# Altium PCB COF.PcbDoc (part 4 of 5)
Units mm, origin at the board's own origin, x right, y up, seen from the top; angles counter-clockwise.
Board outline 42.1 x 32.68 mm, 2 copper layers (TOP, BOTTOM), stack 0.321 mm thick; 42 components, 54 nets, 189 pads, 156 vias.
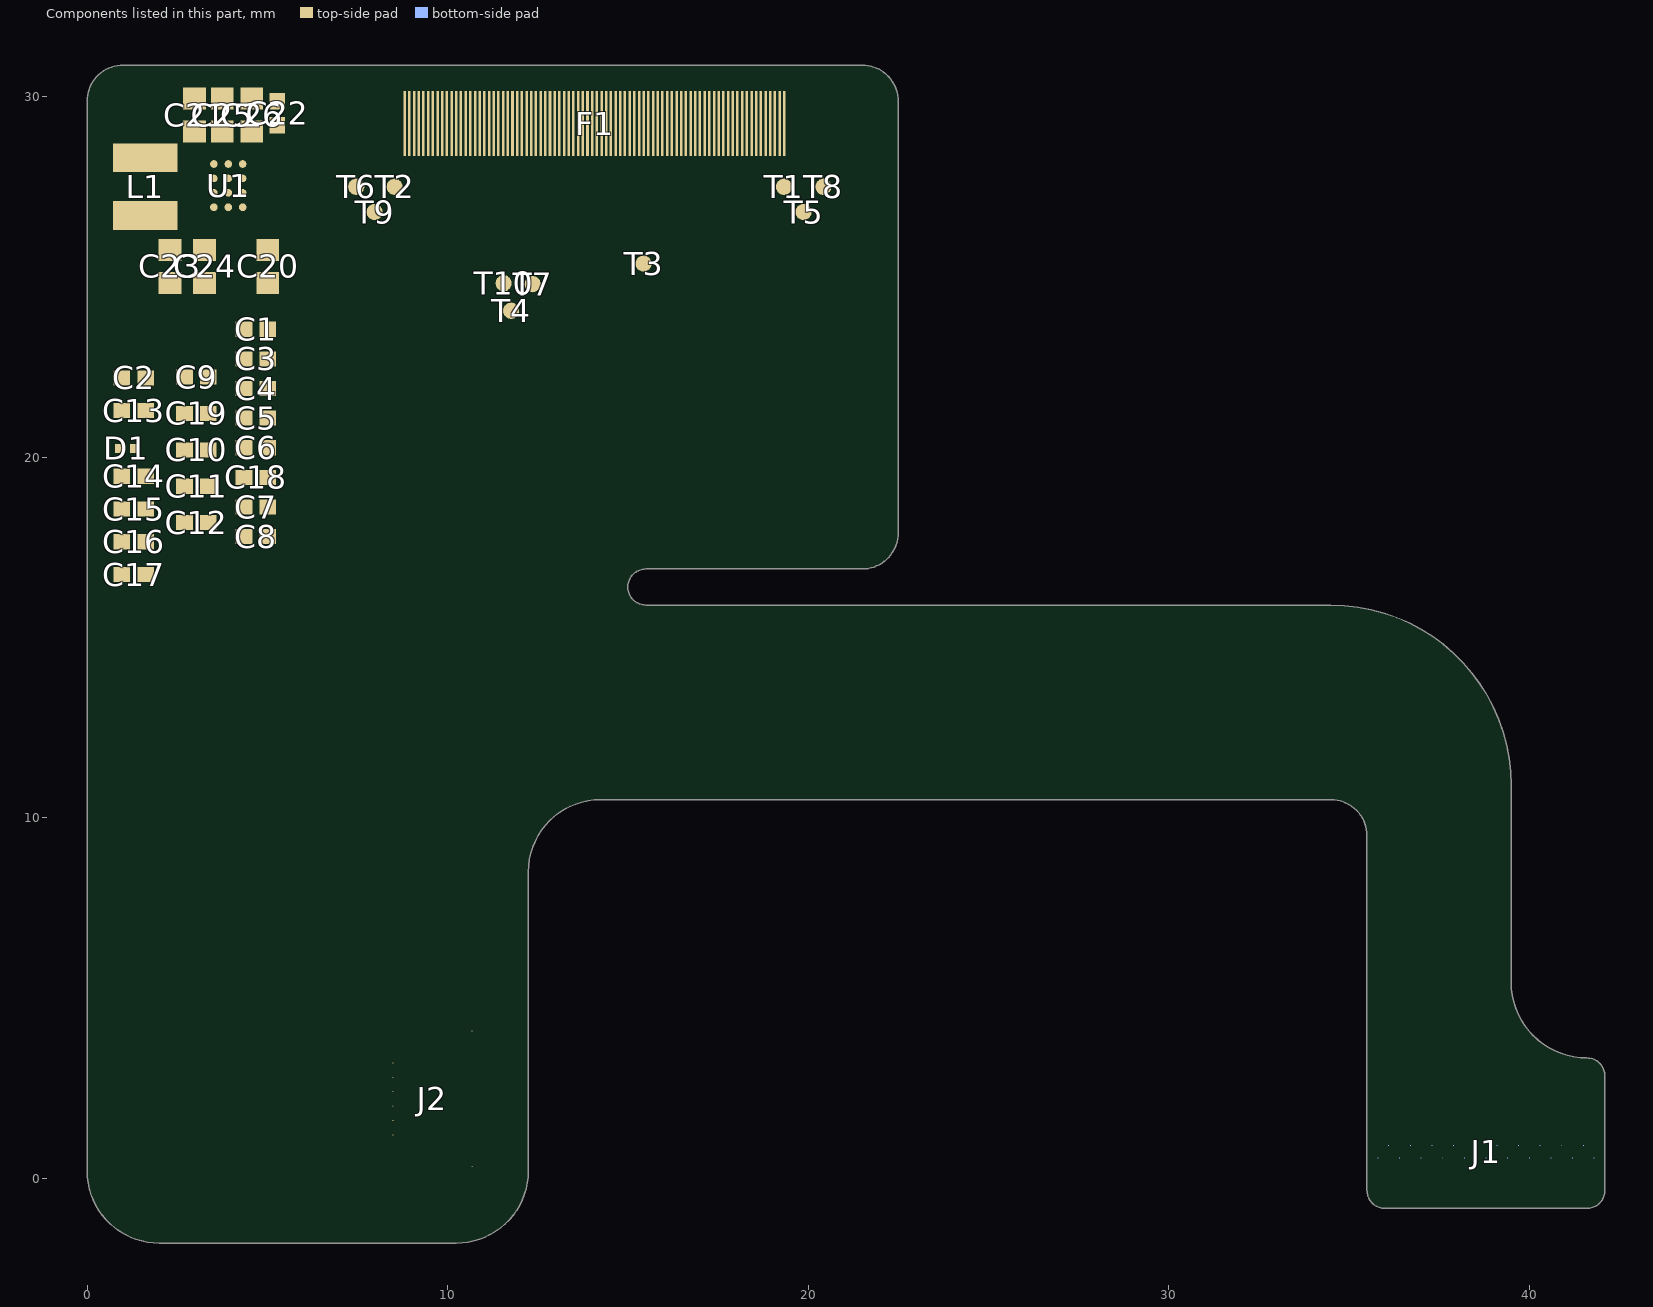
[diagram p3: the components of this part, seen from the top]

## Silkscreen, mask and mechanical layers (free items; w line width, h text height) (continued)
Fab Notes:
  drawing of 11907 lines, arcs and shapes, not listed
  text "GOAR<0102> EIN" at 13.683,38.228 h0.01 r270
  text "GOAR<0304> ECK1" at 13.773,38.235 h0.01 r270
  text "GOAR<0304> ECK1" at 13.803,38.235 h0.01 r270
  text "GOAR<0506> ECK2" at 13.863,38.235 h0.01 r270
  text "GOAR<0506> ECK2" at 13.893,38.235 h0.01 r270
  text "GOAR<09> DEMUX4" at 13.983,38.238 h0.01 r270
  text "GOAR<11> DEMUX5" at 14.013,38.238 h0.01 r270
  text "GOAR<13> DEMUX6" at 14.043,38.238 h0.01 r270
  text "GOAL<13> DEMUX3" at 14.073,38.237 h0.01 r270
  text "GOAL<11> DEMUX2" at 14.103,38.237 h0.01 r270
  text "GOAL<09> DEMUX1" at 14.133,38.237 h0.01 r270
  text "GOAL<0506> SCK2" at 14.223,38.234 h0.01 r270
  text "GOAL<0506> SCK2" at 14.253,38.234 h0.01 r270
  text "GOAL<0304> SCK1" at 14.313,38.234 h0.01 r270
  text "GOAL<0304> SCK1" at 14.343,38.234 h0.01 r270
  text "GOAL<0102> SIN" at 14.433,38.227 h0.01 r270
  text "DUMMY" at 9.245,38.197 h0.01 r270
  text "DUMMY" at 9.275,38.197 h0.01 r270
  text "DUMMY" at 9.305,38.197 h0.01 r270
  text "DUMMY" at 9.335,38.197 h0.01 r270
  text "DUMMY" at 9.365,38.197 h0.01 r270
  text "DUMMY" at 9.395,38.197 h0.01 r270
  text "FOG1_R" at 9.425,38.198 h0.01 r270
  text "FOG2_R" at 9.455,38.198 h0.01 r270
  text "DUMMY" at 9.485,38.197 h0.01 r270
  text "DUMMY" at 9.755,38.197 h0.01 r270
  text "DUMMY" at 9.785,38.197 h0.01 r270
  text "DUMMY" at 9.815,38.197 h0.01 r270
  text "DUMMY" at 10.085,38.197 h0.01 r270
  text "DUMMY" at 10.115,38.197 h0.01 r270
  text "DUMMY" at 13.203,38.197 h0.01 r270
  text "DUMMY" at 13.233,38.197 h0.01 r270
  text "DUMMY" at 13.323,38.197 h0.01 r270
  text "DUMMY" at 13.353,38.197 h0.01 r270
  text "DUMMY" at 13.383,38.197 h0.01 r270
  text "DUMMY" at 13.413,38.197 h0.01 r270
  text "DUMMY" at 13.443,38.197 h0.01 r270
  text "DUMMY" at 13.473,38.197 h0.01 r270
  text "DUMMY" at 13.563,38.197 h0.01 r270
  text "DUMMY" at 13.593,38.197 h0.01 r270
  text "EM_OUT" at 13.623,38.199 h0.01 r270
  text "DUMMY" at 13.653,38.197 h0.01 r270
  text "DUMMY" at 13.713,38.197 h0.01 r270
  text "DUMMY" at 13.743,38.197 h0.01 r270
  text "DUMMY" at 13.833,38.197 h0.01 r270
  text "DUMMY" at 13.923,38.197 h0.01 r270
  text "DUMMY" at 13.953,38.197 h0.01 r270
  text "DUMMY" at 14.163,38.197 h0.01 r270
  text "DUMMY" at 14.193,38.197 h0.01 r270
  text "DUMMY" at 14.283,38.197 h0.01 r270
  text "DUMMY" at 14.373,38.197 h0.01 r270
  text "DUMMY" at 14.403,38.197 h0.01 r270
  text "DUMMY" at 14.463,38.197 h0.01 r270
  text "SCAN_OUT" at 14.493,38.208 h0.01 r270
  text "DUMMY" at 14.523,38.197 h0.01 r270
  text "DUMMY" at 14.553,38.197 h0.01 r270
  text "DUMMY" at 14.643,38.197 h0.01 r270
  text "DUMMY" at 14.673,38.197 h0.01 r270
  text "DUMMY" at 14.763,38.197 h0.01 r270
  text "DUMMY" at 14.793,38.197 h0.01 r270
  text "DUMMY" at 14.883,38.197 h0.01 r270
  text "DUMMY" at 14.913,38.197 h0.01 r270
  text "DUMMY" at 18.031,38.197 h0.01 r270
  text "DUMMY" at 18.061,38.197 h0.01 r270
  text "DUMMY" at 18.331,38.197 h0.01 r270
  text "DUMMY" at 18.361,38.197 h0.01 r270
  text "DUMMY" at 18.391,38.197 h0.01 r270
  text "DUMMY" at 18.661,38.197 h0.01 r270
  text "FOG2_L" at 18.691,38.197 h0.01 r270
  text "FOG1_L" at 18.721,38.197 h0.01 r270
  text "DUMMY" at 18.751,38.197 h0.01 r270
  text "DUMMY" at 18.781,38.197 h0.01 r270
  text "DUMMY" at 18.811,38.197 h0.01 r270
  text "DUMMY" at 18.841,38.197 h0.01 r270
  text "DUMMY" at 18.871,38.197 h0.01 r270
  text "DUMMY" at 18.901,38.197 h0.01 r270
  text "ELVSS" at 9.515,38.193 h0.01 r270
  text "ELVSS" at 9.545,38.193 h0.01 r270
  text "ELVSS" at 9.575,38.193 h0.01 r270
  text "ELVSS" at 9.605,38.193 h0.01 r270
  text "ELVSS" at 9.635,38.193 h0.01 r270
  text "ELVSS" at 9.665,38.193 h0.01 r270
  text "ELVSS" at 9.695,38.193 h0.01 r270
  text "ELVSS" at 9.725,38.193 h0.01 r270
  text "ELVDD" at 9.845,38.194 h0.01 r270
  text "ELVDD" at 9.875,38.194 h0.01 r270
  text "ELVDD" at 9.905,38.194 h0.01 r270
  text "ELVDD" at 9.935,38.194 h0.01 r270
  text "ELVDD" at 9.965,38.194 h0.01 r270
  text "ELVDD" at 9.995,38.194 h0.01 r270
  text "ELVDD" at 10.025,38.194 h0.01 r270
  text "ELVDD" at 10.055,38.194 h0.01 r270
  text "S1" at 10.145,38.179 h0.01 r270
  text "S2" at 10.175,38.179 h0.01 r270
  text "S3" at 10.205,38.179 h0.01 r270
  text "S4" at 10.235,38.179 h0.01 r270
  text "S5" at 10.265,38.179 h0.01 r270
  text "S6" at 10.295,38.179 h0.01 r270
  text "S7" at 10.324,38.179 h0.01 r270
  text "S8" at 10.354,38.179 h0.01 r270
  text "S9" at 10.384,38.179 h0.01 r270
  text "S10" at 10.414,38.183 h0.01 r270
  text "S11" at 10.444,38.183 h0.01 r270
  text "S12" at 10.474,38.183 h0.01 r270
  text "S13" at 10.504,38.183 h0.01 r270
  text "S14" at 10.534,38.183 h0.01 r270
  text "S15" at 10.564,38.183 h0.01 r270
  text "S16" at 10.594,38.183 h0.01 r270
  text "S17" at 10.624,38.183 h0.01 r270
  text "S18" at 10.654,38.183 h0.01 r270
  text "S19" at 10.684,38.183 h0.01 r270
  text "S20" at 10.714,38.183 h0.01 r270
  text "S21" at 10.744,38.183 h0.01 r270
  text "S22" at 10.774,38.183 h0.01 r270
  text "S23" at 10.804,38.183 h0.01 r270
  text "S24" at 10.834,38.183 h0.01 r270
  text "S25" at 10.864,38.183 h0.01 r270
  text "S26" at 10.894,38.183 h0.01 r270
  text "S27" at 10.924,38.183 h0.01 r270
  text "S28" at 10.954,38.183 h0.01 r270
  text "S29" at 10.984,38.183 h0.01 r270
  text "S30" at 11.014,38.183 h0.01 r270
  text "S31" at 11.044,38.183 h0.01 r270
  text "S32" at 11.074,38.183 h0.01 r270
  text "S33" at 11.104,38.183 h0.01 r270
  text "S34" at 11.134,38.183 h0.01 r270
  text "S35" at 11.164,38.183 h0.01 r270
  text "S36" at 11.194,38.183 h0.01 r270
  text "S37" at 11.224,38.183 h0.01 r270
  text "S38" at 11.254,38.183 h0.01 r270
  text "S39" at 11.284,38.183 h0.01 r270
  text "S40" at 11.314,38.183 h0.01 r270
  text "S41" at 11.344,38.183 h0.01 r270
  text "S42" at 11.374,38.183 h0.01 r270
  text "S43" at 11.404,38.183 h0.01 r270
  text "S44" at 11.434,38.183 h0.01 r270
  text "S45" at 11.464,38.183 h0.01 r270
  text "S46" at 11.494,38.183 h0.01 r270
  text "S47" at 11.524,38.183 h0.01 r270
  text "S48" at 11.554,38.183 h0.01 r270
  text "S49" at 11.584,38.183 h0.01 r270
  text "S50" at 11.614,38.183 h0.01 r270
  text "S51" at 11.644,38.183 h0.01 r270
  text "S52" at 11.674,38.183 h0.01 r270
  text "S53" at 11.704,38.183 h0.01 r270
  text "S54" at 11.734,38.183 h0.01 r270
  text "S55" at 11.764,38.183 h0.01 r270
  text "S56" at 11.794,38.183 h0.01 r270
  text "S57" at 11.824,38.183 h0.01 r270
  text "S58" at 11.854,38.183 h0.01 r270
  text "S59" at 11.884,38.183 h0.01 r270
  text "S60" at 11.914,38.183 h0.01 r270
  text "S61" at 11.944,38.183 h0.01 r270
  text "S62" at 11.974,38.183 h0.01 r270
  text "S63" at 12.004,38.183 h0.01 r270
  text "S64" at 12.034,38.183 h0.01 r270
  text "S65" at 12.064,38.183 h0.01 r270
  text "S66" at 12.094,38.183 h0.01 r270
  text "S67" at 12.124,38.183 h0.01 r270
  text "S68" at 12.154,38.183 h0.01 r270
  text "S69" at 12.184,38.183 h0.01 r270
  text "S70" at 12.214,38.183 h0.01 r270
  text "S71" at 12.244,38.183 h0.01 r270
  text "S72" at 12.274,38.183 h0.01 r270
  text "S73" at 12.304,38.183 h0.01 r270
  text "S74" at 12.334,38.183 h0.01 r270
  text "S75" at 12.364,38.183 h0.01 r270
  text "S76" at 12.394,38.183 h0.01 r270
  text "S77" at 12.424,38.183 h0.01 r270
  text "S78" at 12.454,38.183 h0.01 r270
  text "S79" at 12.484,38.183 h0.01 r270
  text "S80" at 12.514,38.183 h0.01 r270
  text "S81" at 12.544,38.183 h0.01 r270
  text "S82" at 12.574,38.183 h0.01 r270
  text "S83" at 12.604,38.183 h0.01 r270
  text "S84" at 12.634,38.183 h0.01 r270
  text "S85" at 12.664,38.183 h0.01 r270
  text "S86" at 12.694,38.183 h0.01 r270
  text "S87" at 12.724,38.183 h0.01 r270
  text "S88" at 12.754,38.183 h0.01 r270
  text "S89" at 12.784,38.183 h0.01 r270
  text "S90" at 12.814,38.183 h0.01 r270
  text "S91" at 12.843,38.183 h0.01 r270
  text "S92" at 12.873,38.183 h0.01 r270
  text "S93" at 12.903,38.183 h0.01 r270
  text "S94" at 12.933,38.183 h0.01 r270
  text "S95" at 12.963,38.183 h0.01 r270
  text "S96" at 12.993,38.183 h0.01 r270
  text "S97" at 13.023,38.183 h0.01 r270
  text "S98" at 13.053,38.183 h0.01 r270
  text "S99" at 13.083,38.183 h0.01 r270
  text "S100" at 13.113,38.187 h0.01 r270
  text "S101" at 13.143,38.187 h0.01 r270
  text "S102" at 13.173,38.187 h0.01 r270
  text "VGL" at 13.263,38.184 h0.01 r270
  text "VGL" at 13.293,38.184 h0.01 r270
  text "VGH" at 13.503,38.185 h0.01 r270
  text "VGH" at 13.533,38.185 h0.01 r270
  text "VGH" at 14.583,38.185 h0.01 r270
  text "VGH" at 14.613,38.185 h0.01 r270
  text "VINT" at 14.703,38.186 h0.01 r270
  text "VINT" at 14.733,38.186 h0.01 r270
  text "VGL" at 14.823,38.184 h0.01 r270
  text "VGL" at 14.853,38.184 h0.01 r270
  text "S132" at 14.943,38.187 h0.01 r270
  text "S133" at 14.973,38.187 h0.01 r270
  text "S134" at 15.003,38.187 h0.01 r270
  text "S135" at 15.033,38.187 h0.01 r270
  text "S136" at 15.063,38.187 h0.01 r270
  text "S137" at 15.093,38.187 h0.01 r270
  text "S138" at 15.123,38.187 h0.01 r270
  text "S139" at 15.153,38.187 h0.01 r270
  text "S140" at 15.183,38.187 h0.01 r270
  text "S141" at 15.213,38.187 h0.01 r270
  text "S142" at 15.243,38.187 h0.01 r270
  text "S143" at 15.273,38.187 h0.01 r270
  text "S144" at 15.303,38.187 h0.01 r270
  text "S145" at 15.332,38.187 h0.01 r270
  text "S146" at 15.362,38.187 h0.01 r270
  text "S147" at 15.392,38.187 h0.01 r270
  text "S148" at 15.422,38.187 h0.01 r270
  text "S149" at 15.452,38.187 h0.01 r270
  text "S150" at 15.482,38.187 h0.01 r270
  text "S151" at 15.512,38.187 h0.01 r270
  text "S152" at 15.542,38.187 h0.01 r270
  text "S153" at 15.572,38.187 h0.01 r270
  text "S154" at 15.602,38.187 h0.01 r270
  text "S155" at 15.632,38.187 h0.01 r270
  text "S156" at 15.662,38.187 h0.01 r270
  text "S157" at 15.692,38.187 h0.01 r270
  text "S158" at 15.722,38.187 h0.01 r270
  text "S159" at 15.752,38.187 h0.01 r270
  text "S160" at 15.782,38.187 h0.01 r270
  text "S161" at 15.812,38.187 h0.01 r270
  text "S162" at 15.842,38.187 h0.01 r270
  text "S163" at 15.872,38.187 h0.01 r270
  text "S164" at 15.902,38.187 h0.01 r270
  text "S165" at 15.932,38.187 h0.01 r270
  text "S166" at 15.962,38.187 h0.01 r270
  text "S167" at 15.992,38.187 h0.01 r270
  text "S168" at 16.022,38.187 h0.01 r270
  text "S169" at 16.052,38.187 h0.01 r270
  text "S170" at 16.082,38.187 h0.01 r270
  text "S171" at 16.112,38.187 h0.01 r270
  text "S172" at 16.142,38.187 h0.01 r270
  text "S173" at 16.172,38.187 h0.01 r270
  text "S174" at 16.202,38.187 h0.01 r270
  text "S175" at 16.232,38.187 h0.01 r270
  text "S176" at 16.262,38.187 h0.01 r270
  text "S177" at 16.292,38.187 h0.01 r270
  text "S178" at 16.322,38.187 h0.01 r270
  text "S179" at 16.352,38.187 h0.01 r270
  text "S180" at 16.382,38.187 h0.01 r270
  text "S181" at 16.412,38.187 h0.01 r270
  text "S182" at 16.442,38.187 h0.01 r270
  text "S183" at 16.472,38.187 h0.01 r270
  text "S184" at 16.502,38.187 h0.01 r270
  text "S185" at 16.532,38.187 h0.01 r270
  text "S186" at 16.562,38.187 h0.01 r270
  text "S187" at 16.592,38.187 h0.01 r270
  text "S188" at 16.622,38.187 h0.01 r270
  text "S189" at 16.652,38.187 h0.01 r270
  text "S190" at 16.682,38.187 h0.01 r270
  text "S191" at 16.712,38.187 h0.01 r270
  text "S192" at 16.742,38.187 h0.01 r270
  text "S193" at 16.772,38.187 h0.01 r270
  text "S194" at 16.802,38.187 h0.01 r270
  text "S195" at 16.832,38.187 h0.01 r270
  text "S196" at 16.862,38.187 h0.01 r270
  text "S197" at 16.892,38.187 h0.01 r270
  text "S198" at 16.922,38.187 h0.01 r270
  text "S199" at 16.952,38.187 h0.01 r270
  text "S200" at 16.982,38.187 h0.01 r270
  text "S201" at 17.012,38.187 h0.01 r270
  text "S202" at 17.042,38.187 h0.01 r270
  text "S203" at 17.072,38.187 h0.01 r270
  text "S204" at 17.102,38.187 h0.01 r270
  text "S205" at 17.132,38.187 h0.01 r270
  text "S206" at 17.162,38.187 h0.01 r270
  text "S207" at 17.192,38.187 h0.01 r270
  text "S208" at 17.222,38.187 h0.01 r270
  text "S209" at 17.252,38.187 h0.01 r270
  text "S210" at 17.282,38.187 h0.01 r270
  text "S211" at 17.312,38.187 h0.01 r270
  text "S212" at 17.342,38.187 h0.01 r270
  text "S213" at 17.372,38.187 h0.01 r270
  text "S214" at 17.402,38.187 h0.01 r270
  text "S215" at 17.432,38.187 h0.01 r270
  text "S216" at 17.462,38.187 h0.01 r270
  text "S217" at 17.492,38.187 h0.01 r270
  text "S218" at 17.522,38.187 h0.01 r270
  text "S219" at 17.552,38.187 h0.01 r270
  text "S220" at 17.582,38.187 h0.01 r270
  text "S221" at 17.612,38.187 h0.01 r270
  text "S222" at 17.642,38.187 h0.01 r270
  text "S223" at 17.672,38.187 h0.01 r270
  text "S224" at 17.702,38.187 h0.01 r270
  text "S225" at 17.732,38.187 h0.01 r270
  text "S226" at 17.762,38.187 h0.01 r270
  text "S227" at 17.792,38.187 h0.01 r270
  text "S228" at 17.821,38.187 h0.01 r270
  text "S229" at 17.851,38.187 h0.01 r270
  text "S230" at 17.881,38.187 h0.01 r270
  text "S231" at 17.911,38.187 h0.01 r270
  text "S232" at 17.941,38.187 h0.01 r270
  text "S233" at 17.971,38.187 h0.01 r270
  text "S234" at 18.001,38.187 h0.01 r270
  text "ELVDD" at 18.091,38.194 h0.01 r270
  text "ELVDD" at 18.121,38.194 h0.01 r270
  text "ELVDD" at 18.151,38.194 h0.01 r270
  text "ELVDD" at 18.181,38.194 h0.01 r270
  text "ELVDD" at 18.211,38.194 h0.01 r270
  text "ELVDD" at 18.241,38.194 h0.01 r270
  text "ELVDD" at 18.271,38.194 h0.01 r270
  text "ELVDD" at 18.301,38.194 h0.01 r270
  text "ELVSS" at 18.421,38.193 h0.01 r270
  text "ELVSS" at 18.451,38.193 h0.01 r270
  text "ELVSS" at 18.481,38.193 h0.01 r270
  text "ELVSS" at 18.511,38.193 h0.01 r270
  text "ELVSS" at 18.541,38.193 h0.01 r270
  text "ELVSS" at 18.571,38.193 h0.01 r270
  text "ELVSS" at 18.601,38.193 h0.01 r270
  text "ELVSS" at 18.631,38.193 h0.01 r270
  text "323" at 9.255,38.119 h0.01 r90
  text "322" at 9.285,38.119 h0.01 r90
  text "321" at 9.315,38.119 h0.01 r90
  text "320" at 9.345,38.119 h0.01 r90
  text "319" at 9.375,38.119 h0.01 r90
  text "318" at 9.405,38.119 h0.01 r90
  text "317" at 9.435,38.119 h0.01 r90
  text "316" at 9.465,38.119 h0.01 r90
  text "315" at 9.495,38.119 h0.01 r90
  text "314" at 9.525,38.119 h0.01 r90
  text "313" at 9.555,38.119 h0.01 r90
  text "312" at 9.585,38.119 h0.01 r90
  text "311" at 9.615,38.119 h0.01 r90
  text "310" at 9.645,38.119 h0.01 r90
  text "309" at 9.675,38.119 h0.01 r90
  text "308" at 9.705,38.119 h0.01 r90
  text "307" at 9.735,38.119 h0.01 r90
  text "306" at 9.765,38.119 h0.01 r90
  text "305" at 9.795,38.119 h0.01 r90
  text "304" at 9.825,38.119 h0.01 r90
  text "303" at 9.855,38.119 h0.01 r90
  text "302" at 9.885,38.119 h0.01 r90
  text "301" at 9.915,38.119 h0.01 r90
  text "300" at 9.945,38.119 h0.01 r90
  text "299" at 9.975,38.119 h0.01 r90
  text "298" at 10.005,38.119 h0.01 r90
  text "297" at 10.035,38.119 h0.01 r90
  text "296" at 10.065,38.119 h0.01 r90
  text "295" at 10.095,38.119 h0.01 r90
  text "294" at 10.125,38.119 h0.01 r90
  text "293" at 10.155,38.119 h0.01 r90
  text "292" at 10.185,38.119 h0.01 r90
  text "291" at 10.215,38.119 h0.01 r90
  text "290" at 10.245,38.119 h0.01 r90
  text "289" at 10.275,38.119 h0.01 r90
  text "288" at 10.305,38.119 h0.01 r90
  text "287" at 10.334,38.119 h0.01 r90
  text "286" at 10.364,38.119 h0.01 r90
  text "285" at 10.394,38.119 h0.01 r90
  text "284" at 10.424,38.119 h0.01 r90
  text "283" at 10.454,38.119 h0.01 r90
  text "282" at 10.484,38.119 h0.01 r90
  text "281" at 10.514,38.119 h0.01 r90
  text "280" at 10.544,38.119 h0.01 r90
  text "279" at 10.574,38.119 h0.01 r90
  text "278" at 10.604,38.119 h0.01 r90
  text "277" at 10.634,38.119 h0.01 r90
  text "276" at 10.664,38.119 h0.01 r90
  text "275" at 10.694,38.119 h0.01 r90
  text "274" at 10.724,38.119 h0.01 r90
  text "273" at 10.754,38.119 h0.01 r90
  text "272" at 10.784,38.119 h0.01 r90
  text "271" at 10.814,38.119 h0.01 r90
  text "270" at 10.844,38.119 h0.01 r90
  text "269" at 10.874,38.119 h0.01 r90
  text "268" at 10.904,38.119 h0.01 r90
  text "267" at 10.934,38.119 h0.01 r90
  text "266" at 10.964,38.119 h0.01 r90
  text "265" at 10.994,38.119 h0.01 r90
  text "264" at 11.024,38.119 h0.01 r90
  text "263" at 11.054,38.119 h0.01 r90
  text "262" at 11.084,38.119 h0.01 r90
  text "261" at 11.114,38.119 h0.01 r90
  text "260" at 11.144,38.119 h0.01 r90
  text "259" at 11.174,38.119 h0.01 r90
  text "258" at 11.204,38.119 h0.01 r90
  text "257" at 11.234,38.119 h0.01 r90
  text "256" at 11.264,38.119 h0.01 r90
  text "255" at 11.294,38.119 h0.01 r90
  text "254" at 11.324,38.119 h0.01 r90
  text "253" at 11.354,38.119 h0.01 r90
  text "252" at 11.384,38.119 h0.01 r90
  text "251" at 11.414,38.119 h0.01 r90
  text "250" at 11.444,38.119 h0.01 r90
  text "249" at 11.474,38.119 h0.01 r90
  text "248" at 11.504,38.119 h0.01 r90
  text "247" at 11.534,38.119 h0.01 r90
  text "246" at 11.564,38.119 h0.01 r90
  text "245" at 11.594,38.119 h0.01 r90
  text "244" at 11.624,38.119 h0.01 r90
  text "243" at 11.654,38.119 h0.01 r90
  text "242" at 11.684,38.119 h0.01 r90
  text "241" at 11.714,38.119 h0.01 r90
  text "240" at 11.744,38.119 h0.01 r90
  text "239" at 11.774,38.119 h0.01 r90
  text "238" at 11.804,38.119 h0.01 r90
  text "237" at 11.834,38.119 h0.01 r90
  text "236" at 11.864,38.119 h0.01 r90
  text "235" at 11.894,38.119 h0.01 r90
  text "234" at 11.924,38.119 h0.01 r90
  text "233" at 11.954,38.119 h0.01 r90
  text "232" at 11.984,38.119 h0.01 r90
  text "231" at 12.014,38.119 h0.01 r90
  text "230" at 12.044,38.119 h0.01 r90
  text "229" at 12.074,38.119 h0.01 r90
  text "228" at 12.104,38.119 h0.01 r90
  text "227" at 12.134,38.119 h0.01 r90
  text "226" at 12.164,38.119 h0.01 r90
  text "225" at 12.194,38.119 h0.01 r90
  text "224" at 12.224,38.119 h0.01 r90
  text "223" at 12.254,38.119 h0.01 r90
  text "222" at 12.284,38.119 h0.01 r90
  text "221" at 12.314,38.119 h0.01 r90
  text "220" at 12.344,38.119 h0.01 r90
  text "219" at 12.374,38.119 h0.01 r90
  text "218" at 12.404,38.119 h0.01 r90
  text "217" at 12.434,38.119 h0.01 r90
  text "216" at 12.464,38.119 h0.01 r90
  text "215" at 12.494,38.119 h0.01 r90
  text "214" at 12.524,38.119 h0.01 r90
  text "213" at 12.554,38.119 h0.01 r90
  text "212" at 12.584,38.119 h0.01 r90
  text "211" at 12.614,38.119 h0.01 r90
  text "210" at 12.644,38.119 h0.01 r90
  text "209" at 12.674,38.119 h0.01 r90
  text "208" at 12.704,38.119 h0.01 r90
  text "207" at 12.734,38.119 h0.01 r90
  text "206" at 12.764,38.119 h0.01 r90
  text "205" at 12.794,38.119 h0.01 r90
  text "204" at 12.823,38.119 h0.01 r90
  text "203" at 12.853,38.119 h0.01 r90
  text "202" at 12.883,38.119 h0.01 r90
  text "201" at 12.913,38.119 h0.01 r90
  text "200" at 12.943,38.119 h0.01 r90
  text "199" at 12.973,38.119 h0.01 r90
  text "198" at 13.003,38.119 h0.01 r90
  text "197" at 13.033,38.119 h0.01 r90
  text "196" at 13.063,38.119 h0.01 r90
  text "195" at 13.093,38.119 h0.01 r90
  text "194" at 13.123,38.119 h0.01 r90
  text "193" at 13.153,38.119 h0.01 r90
  text "192" at 13.183,38.119 h0.01 r90
  text "191" at 13.213,38.119 h0.01 r90
  text "190" at 13.243,38.119 h0.01 r90
  text "189" at 13.273,38.119 h0.01 r90
  text "188" at 13.303,38.119 h0.01 r90
  text "187" at 13.333,38.119 h0.01 r90
  text "186" at 13.363,38.119 h0.01 r90
  text "185" at 13.393,38.119 h0.01 r90
  text "184" at 13.423,38.119 h0.01 r90
  text "183" at 13.453,38.119 h0.01 r90
  text "182" at 13.483,38.119 h0.01 r90
  text "181" at 13.513,38.119 h0.01 r90
  text "180" at 13.543,38.119 h0.01 r90
  text "179" at 13.573,38.119 h0.01 r90
  text "178" at 13.603,38.119 h0.01 r90
  text "177" at 13.633,38.119 h0.01 r90
  text "176" at 13.663,38.119 h0.01 r90
  text "175" at 13.693,38.119 h0.01 r90
  text "174" at 13.723,38.119 h0.01 r90
  text "173" at 13.753,38.119 h0.01 r90
  text "172" at 13.783,38.119 h0.01 r90
  text "171" at 13.813,38.119 h0.01 r90
  text "170" at 13.843,38.119 h0.01 r90
  text "169" at 13.873,38.119 h0.01 r90
  text "168" at 13.903,38.119 h0.01 r90
  text "167" at 13.933,38.119 h0.01 r90
  text "166" at 13.963,38.119 h0.01 r90
  text "165" at 13.993,38.119 h0.01 r90
  text "164" at 14.023,38.119 h0.01 r90
  text "163" at 14.053,38.119 h0.01 r90
  text "162" at 14.083,38.119 h0.01 r90
  text "161" at 14.113,38.119 h0.01 r90
  text "160" at 14.143,38.119 h0.01 r90
  text "159" at 14.173,38.119 h0.01 r90
  text "158" at 14.203,38.119 h0.01 r90
  text "157" at 14.233,38.119 h0.01 r90
  text "156" at 14.263,38.119 h0.01 r90
  text "155" at 14.293,38.119 h0.01 r90
  text "154" at 14.323,38.119 h0.01 r90
  text "153" at 14.353,38.119 h0.01 r90
  text "152" at 14.383,38.119 h0.01 r90
  text "151" at 14.413,38.119 h0.01 r90
  text "150" at 14.443,38.119 h0.01 r90
  text "149" at 14.473,38.119 h0.01 r90
  text "148" at 14.503,38.119 h0.01 r90
  text "147" at 14.533,38.119 h0.01 r90
  text "146" at 14.563,38.119 h0.01 r90
  text "145" at 14.593,38.119 h0.01 r90
  text "144" at 14.623,38.119 h0.01 r90
  text "143" at 14.653,38.119 h0.01 r90
  text "142" at 14.683,38.119 h0.01 r90
  text "141" at 14.713,38.119 h0.01 r90
  text "140" at 14.743,38.119 h0.01 r90
  text "139" at 14.773,38.119 h0.01 r90
  text "138" at 14.803,38.119 h0.01 r90
  text "137" at 14.833,38.119 h0.01 r90
  text "136" at 14.863,38.119 h0.01 r90
  text "135" at 14.893,38.119 h0.01 r90
  text "134" at 14.923,38.119 h0.01 r90
  text "133" at 14.953,38.119 h0.01 r90
  text "132" at 14.983,38.119 h0.01 r90
  text "131" at 15.013,38.119 h0.01 r90
  text "130" at 15.043,38.119 h0.01 r90
  text "129" at 15.073,38.119 h0.01 r90
  text "128" at 15.103,38.119 h0.01 r90
  text "127" at 15.133,38.119 h0.01 r90
  text "126" at 15.163,38.119 h0.01 r90
  text "125" at 15.193,38.119 h0.01 r90
  text "124" at 15.223,38.119 h0.01 r90
  text "123" at 15.253,38.119 h0.01 r90
  text "122" at 15.283,38.119 h0.01 r90
  text "121" at 15.313,38.119 h0.01 r90
  text "120" at 15.342,38.119 h0.01 r90
  text "119" at 15.372,38.119 h0.01 r90
  text "118" at 15.402,38.119 h0.01 r90
  text "117" at 15.432,38.119 h0.01 r90
  text "116" at 15.462,38.119 h0.01 r90
  text "115" at 15.492,38.119 h0.01 r90
  text "114" at 15.522,38.119 h0.01 r90
  text "113" at 15.552,38.119 h0.01 r90
  text "112" at 15.582,38.119 h0.01 r90
  text "111" at 15.612,38.119 h0.01 r90
  text "110" at 15.642,38.119 h0.01 r90
  text "109" at 15.672,38.119 h0.01 r90
  text "108" at 15.702,38.119 h0.01 r90
  text "107" at 15.732,38.119 h0.01 r90
  text "106" at 15.762,38.119 h0.01 r90
  text "105" at 15.792,38.119 h0.01 r90
  text "104" at 15.822,38.119 h0.01 r90
  text "103" at 15.852,38.119 h0.01 r90
  text "102" at 15.882,38.119 h0.01 r90
  text "101" at 15.912,38.119 h0.01 r90
  text "100" at 15.942,38.119 h0.01 r90
  text "99" at 15.972,38.123 h0.01 r90
  text "98" at 16.002,38.123 h0.01 r90
  text "97" at 16.032,38.123 h0.01 r90
  text "96" at 16.062,38.123 h0.01 r90
  text "95" at 16.092,38.123 h0.01 r90
  text "94" at 16.122,38.123 h0.01 r90
  text "93" at 16.152,38.123 h0.01 r90
  text "92" at 16.182,38.123 h0.01 r90
  text "91" at 16.212,38.123 h0.01 r90
  text "90" at 16.242,38.123 h0.01 r90
  text "89" at 16.272,38.123 h0.01 r90
  text "88" at 16.302,38.123 h0.01 r90
  text "87" at 16.332,38.123 h0.01 r90
  text "86" at 16.362,38.123 h0.01 r90
  text "85" at 16.392,38.123 h0.01 r90
  text "84" at 16.422,38.123 h0.01 r90
  text "83" at 16.452,38.123 h0.01 r90
  text "82" at 16.482,38.123 h0.01 r90
  text "81" at 16.512,38.123 h0.01 r90
  text "80" at 16.542,38.123 h0.01 r90
  text "79" at 16.572,38.123 h0.01 r90
  text "78" at 16.602,38.123 h0.01 r90
  text "77" at 16.632,38.123 h0.01 r90
  text "76" at 16.662,38.123 h0.01 r90
  text "75" at 16.692,38.123 h0.01 r90
  text "74" at 16.722,38.123 h0.01 r90
  text "73" at 16.752,38.123 h0.01 r90
  text "72" at 16.782,38.123 h0.01 r90
  text "71" at 16.812,38.123 h0.01 r90
  text "70" at 16.842,38.123 h0.01 r90
  text "69" at 16.872,38.123 h0.01 r90
  text "68" at 16.902,38.123 h0.01 r90
  text "67" at 16.932,38.123 h0.01 r90
  text "66" at 16.962,38.123 h0.01 r90
  text "65" at 16.992,38.123 h0.01 r90
  text "64" at 17.022,38.123 h0.01 r90
  text "63" at 17.052,38.123 h0.01 r90
  text "62" at 17.082,38.123 h0.01 r90
  text "61" at 17.112,38.123 h0.01 r90
  text "60" at 17.142,38.123 h0.01 r90
  text "59" at 17.172,38.123 h0.01 r90
  text "58" at 17.202,38.123 h0.01 r90
  text "57" at 17.232,38.123 h0.01 r90
  text "56" at 17.262,38.123 h0.01 r90
  text "55" at 17.292,38.123 h0.01 r90
  text "54" at 17.322,38.123 h0.01 r90
  text "53" at 17.352,38.123 h0.01 r90
  text "52" at 17.382,38.123 h0.01 r90
  text "51" at 17.412,38.123 h0.01 r90
  text "50" at 17.442,38.123 h0.01 r90
  text "49" at 17.472,38.123 h0.01 r90
  text "48" at 17.502,38.123 h0.01 r90
  text "47" at 17.532,38.123 h0.01 r90
  text "46" at 17.562,38.123 h0.01 r90
  text "45" at 17.592,38.123 h0.01 r90
  text "44" at 17.622,38.123 h0.01 r90
  text "43" at 17.652,38.123 h0.01 r90
  text "42" at 17.682,38.123 h0.01 r90
  text "41" at 17.712,38.123 h0.01 r90
  text "40" at 17.742,38.123 h0.01 r90
  text "39" at 17.772,38.123 h0.01 r90
  text "38" at 17.802,38.123 h0.01 r90
  text "37" at 17.831,38.123 h0.01 r90
  text "36" at 17.861,38.123 h0.01 r90
  text "35" at 17.891,38.123 h0.01 r90
  text "34" at 17.921,38.123 h0.01 r90
  text "33" at 17.951,38.123 h0.01 r90
  text "32" at 17.981,38.123 h0.01 r90
  text "31" at 18.011,38.123 h0.01 r90
  text "30" at 18.041,38.123 h0.01 r90
  text "29" at 18.071,38.123 h0.01 r90
  text "28" at 18.101,38.123 h0.01 r90
  text "27" at 18.131,38.123 h0.01 r90
  text "26" at 18.161,38.123 h0.01 r90
  text "25" at 18.191,38.123 h0.01 r90
  text "24" at 18.221,38.123 h0.01 r90
  text "23" at 18.251,38.123 h0.01 r90
  text "22" at 18.281,38.123 h0.01 r90
  text "21" at 18.311,38.123 h0.01 r90
  text "20" at 18.341,38.123 h0.01 r90
  text "19" at 18.371,38.123 h0.01 r90
  text "18" at 18.401,38.123 h0.01 r90
  text "17" at 18.431,38.123 h0.01 r90
  text "16" at 18.461,38.123 h0.01 r90
  text "15" at 18.491,38.123 h0.01 r90
  text "14" at 18.521,38.123 h0.01 r90
  text "13" at 18.551,38.123 h0.01 r90
  text "12" at 18.581,38.123 h0.01 r90
  text "11" at 18.611,38.123 h0.01 r90
  text "10" at 18.641,38.123 h0.01 r90
  text "9" at 18.671,38.127 h0.01 r90
  text "8" at 18.701,38.127 h0.01 r90
  text "7" at 18.731,38.127 h0.01 r90
  text "6" at 18.761,38.127 h0.01 r90
  text "5" at 18.791,38.127 h0.01 r90
  text "4" at 18.821,38.127 h0.01 r90
  text "3" at 18.851,38.127 h0.01 r90
  text "2" at 18.881,38.127 h0.01 r90
  text "1" at 18.911,38.127 h0.01 r90
  text "EM_OUT" at 13.575,35.403 h0.04 r90
  text "SCAN_OUT" at 14.543,35.38 h0.04 r90
  text "S<234>" at 18.323,35.019 h0.02 r90
  text "S<1>" at 9.786,35.009 h0.02 r90
  text "G}" at 12.103,34.974 h0.3
  text "GOAR<0506> ECK2" at 9.3,34.867 h0.02 r90
  text "GOAL<0506> SCK2" at 18.87,34.854 h0.02 r90
  text "GOAL<0304> SCK1" at 18.492,34.722 h0.02 r90
  text "GOAR<0304> ECK1" at 9.701,34.708 h0.02 r90
  text "GOAL<09> DEMUX1" at 18.95,34.559 h0.02 r90
  text "GOAR<11> DEMUX5" at 8.949,34.529 h0.02 r90
  text "GOAR<09> DEMUX4" at 9.256,34.53 h0.02 r90
  text "GOAL<11> DEMUX2" at 19.255,34.516 h0.02 r90
  text "GOAR<0102> EIN" at 9.778,34.467 h0.02 r90
  text "GOAR<13> DEMUX6" at 8.639,34.444 h0.02 r90
  text "GOAL<0102> SIN" at 18.389,34.449 h0.02 r90
  text "GOAL<13> DEMUX3" at 19.553,34.419 h0.02 r90
  text "191" at 9.113,33.702 h0.01
  text "193" at 9.175,33.702 h0.01
  text "195" at 9.238,33.702 h0.01
  text "197" at 9.301,33.702 h0.01
  text "199" at 9.364,33.702 h0.01
  text "201" at 9.429,33.702 h0.01
  text "203" at 9.491,33.702 h0.01
  text "205" at 9.554,33.702 h0.01
  text "207" at 9.617,33.702 h0.01
  text "209" at 9.68,33.702 h0.01
  text "211" at 9.744,33.702 h0.01
  text "213" at 9.806,33.702 h0.01
  text "215" at 9.869,33.702 h0.01
  text "217" at 9.95,33.702 h0.01
  text "219" at 10.004,33.702 h0.01
  text "221" at 10.059,33.702 h0.01
  text "223" at 10.112,33.702 h0.01
  text "225" at 10.166,33.702 h0.01
  text "227" at 10.22,33.702 h0.01
  text "229" at 10.274,33.702 h0.01
  text "231" at 10.329,33.702 h0.01
  text "233" at 10.382,33.702 h0.01
  text "235" at 10.436,33.702 h0.01
  text "237" at 10.49,33.702 h0.01
  text "239" at 10.544,33.702 h0.01
  text "241" at 10.599,33.702 h0.01
  text "243" at 10.652,33.702 h0.01
  text "245" at 10.706,33.702 h0.01
  text "247" at 10.76,33.702 h0.01
  text "249" at 10.814,33.702 h0.01
  text "251" at 10.869,33.702 h0.01
  text "253" at 10.922,33.702 h0.01
  text "255" at 10.976,33.702 h0.01
  text "257" at 11.03,33.702 h0.01
  text "259" at 11.084,33.702 h0.01
  text "261" at 11.139,33.702 h0.01
  text "263" at 11.192,33.702 h0.01
  text "265" at 11.246,33.702 h0.01
  text "267" at 11.3,33.702 h0.01
  text "269" at 11.354,33.702 h0.01
  text "271" at 11.409,33.702 h0.01
  text "273" at 11.462,33.702 h0.01
  text "275" at 11.516,33.702 h0.01
  text "277" at 11.57,33.702 h0.01
  text "279" at 11.624,33.702 h0.01
  text "281" at 11.679,33.702 h0.01
  text "283" at 11.732,33.702 h0.01
  text "285" at 11.786,33.702 h0.01
  text "287" at 11.84,33.702 h0.01
  text "289" at 11.894,33.702 h0.01
  text "291" at 11.949,33.702 h0.01
  text "293" at 12.002,33.702 h0.01
  text "295" at 12.056,33.702 h0.01
  text "297" at 12.11,33.702 h0.01
  text "299" at 12.164,33.702 h0.01
  text "301" at 12.219,33.702 h0.01
  text "303" at 12.272,33.702 h0.01
  text "305" at 12.326,33.702 h0.01
  text "307" at 12.38,33.702 h0.01
  text "309" at 12.434,33.702 h0.01
  text "311" at 12.489,33.702 h0.01
  text "313" at 12.542,33.702 h0.01
  text "315" at 12.596,33.702 h0.01
  text "317" at 12.65,33.702 h0.01
  text "319" at 12.704,33.702 h0.01
  text "321" at 12.759,33.702 h0.01
  text "323" at 12.812,33.702 h0.01
  text "325" at 12.866,33.702 h0.01
  text "327" at 12.92,33.702 h0.01
  text "329" at 12.974,33.702 h0.01
  text "331" at 13.029,33.702 h0.01
  text "333" at 13.082,33.702 h0.01
  text "335" at 13.136,33.702 h0.01
  text "337" at 13.19,33.702 h0.01
  text "339" at 13.262,33.702 h0.01
  text "341" at 13.344,33.702 h0.01
  text "343" at 13.424,33.702 h0.01
  text "345" at 13.505,33.702 h0.01
  text "347" at 13.586,33.702 h0.01
  text "349" at 13.667,33.702 h0.01
  text "351" at 13.749,33.702 h0.01
  text "353" at 13.829,33.702 h0.01
  text "355" at 13.91,33.702 h0.01
  text "357" at 13.991,33.702 h0.01
  text "359" at 14.072,33.702 h0.01
  text "361" at 14.154,33.702 h0.01
  text "363" at 14.234,33.702 h0.01
  text "365" at 14.315,33.702 h0.01
  text "367" at 14.396,33.702 h0.01
  text "369" at 14.477,33.702 h0.01
  text "371" at 14.559,33.702 h0.01
  text "373" at 14.639,33.702 h0.01
  text "375" at 14.72,33.702 h0.01
  text "377" at 14.801,33.702 h0.01
  text "379" at 14.882,33.702 h0.01
  text "381" at 14.955,33.702 h0.01
  text "383" at 15.008,33.702 h0.01
  text "385" at 15.062,33.702 h0.01
  text "387" at 15.116,33.702 h0.01
  text "389" at 15.17,33.702 h0.01
  text "391" at 15.225,33.702 h0.01
  text "393" at 15.278,33.702 h0.01
  text "395" at 15.332,33.702 h0.01
  text "397" at 15.386,33.702 h0.01
  text "399" at 15.44,33.702 h0.01
  text "401" at 15.495,33.702 h0.01
  text "403" at 15.548,33.702 h0.01
  text "405" at 15.602,33.702 h0.01
  text "407" at 15.656,33.702 h0.01
  text "409" at 15.71,33.702 h0.01
  text "411" at 15.765,33.702 h0.01
  text "413" at 15.818,33.702 h0.01
  text "415" at 15.872,33.702 h0.01
  text "417" at 15.926,33.702 h0.01
  text "419" at 15.98,33.702 h0.01
  text "421" at 16.035,33.702 h0.01
  text "423" at 16.088,33.702 h0.01
  text "425" at 16.142,33.702 h0.01
  text "427" at 16.196,33.702 h0.01
  text "429" at 16.25,33.702 h0.01
  text "431" at 16.305,33.702 h0.01
  text "433" at 16.358,33.702 h0.01
  text "435" at 16.412,33.702 h0.01
  text "437" at 16.466,33.702 h0.01
  text "439" at 16.52,33.702 h0.01
  text "441" at 16.575,33.702 h0.01
  text "443" at 16.628,33.702 h0.01
  text "445" at 16.682,33.702 h0.01
  text "447" at 16.736,33.702 h0.01
  text "449" at 16.79,33.702 h0.01
  text "451" at 16.845,33.702 h0.01
  text "453" at 16.898,33.702 h0.01
  text "455" at 16.952,33.702 h0.01
  text "457" at 17.006,33.702 h0.01
  text "459" at 17.06,33.702 h0.01
  text "461" at 17.115,33.702 h0.01
  text "463" at 17.168,33.702 h0.01
  text "465" at 17.222,33.702 h0.01
  text "467" at 17.276,33.702 h0.01
  text "469" at 17.33,33.702 h0.01
  text "471" at 17.385,33.702 h0.01
  text "473" at 17.438,33.702 h0.01
  text "475" at 17.492,33.702 h0.01
  text "477" at 17.546,33.702 h0.01
  text "479" at 17.6,33.702 h0.01
  text "481" at 17.655,33.702 h0.01
  text "483" at 17.708,33.702 h0.01
  text "485" at 17.762,33.702 h0.01
  text "487" at 17.816,33.702 h0.01
  text "489" at 17.87,33.702 h0.01
  text "491" at 17.925,33.702 h0.01
  text "493" at 17.978,33.702 h0.01
  text "495" at 18.032,33.702 h0.01
  text "497" at 18.086,33.702 h0.01
  text "499" at 18.14,33.702 h0.01
  text "501" at 18.195,33.702 h0.01
  text "503" at 18.275,33.702 h0.01
  text "505" at 18.338,33.702 h0.01
  text "507" at 18.401,33.702 h0.01
  text "509" at 18.464,33.702 h0.01
  text "511" at 18.528,33.702 h0.01
  text "513" at 18.59,33.702 h0.01
  text "515" at 18.653,33.702 h0.01
  text "517" at 18.716,33.702 h0.01
  text "519" at 18.779,33.702 h0.01
  text "521" at 18.843,33.702 h0.01
  text "523" at 18.905,33.702 h0.01
  text "525" at 18.968,33.702 h0.01
  text "527" at 19.031,33.702 h0.01
  text "GOA_R<16>" at 9.098,33.695 h0.01
  text "GOA_R<14>" at 9.161,33.695 h0.01
  text "GOA_R<12>" at 9.224,33.695 h0.01
  text "GOA_R<10>" at 9.287,33.695 h0.01
  text "GOA_R<8>" at 9.352,33.695 h0.01
  text "GOA_R<6>" at 9.415,33.695 h0.01
  text "GOA_R<4>" at 9.478,33.695 h0.01
  text "GOA_R<2>" at 9.541,33.695 h0.01
  text "DUMMY" at 9.609,33.695 h0.01
  text "VGL" at 9.679,33.695 h0.01
  text "VGH" at 9.742,33.695 h0.01
  text "VINT" at 9.804,33.695 h0.01
  text "DUMMY" at 9.861,33.695 h0.01
  text "S_R_TEST" at 9.937,33.695 h0.01
  text "S<2>" at 10.001,33.695 h0.01
  text "S<4>" at 10.055,33.695 h0.01
  text "S<6>" at 10.109,33.695 h0.01
  text "S<8>" at 10.163,33.695 h0.01
  text "S<10>" at 10.215,33.695 h0.01
  text "S<12>" at 10.269,33.695 h0.01
  text "S<14>" at 10.323,33.695 h0.01
  text "S<16>" at 10.377,33.695 h0.01
  text "S<18>" at 10.431,33.695 h0.01
  text "S<20>" at 10.485,33.695 h0.01
  text "S<22>" at 10.539,33.695 h0.01
  text "S<24>" at 10.593,33.695 h0.01
  text "S<26>" at 10.647,33.695 h0.01
  text "S<28>" at 10.701,33.695 h0.01
  text "S<30>" at 10.755,33.695 h0.01
  text "S<32>" at 10.809,33.695 h0.01
  text "S<34>" at 10.863,33.695 h0.01
  text "S<36>" at 10.917,33.695 h0.01
  text "S<38>" at 10.971,33.695 h0.01
  text "S<40>" at 11.025,33.695 h0.01
  text "S<42>" at 11.079,33.695 h0.01
  text "S<44>" at 11.133,33.695 h0.01
  text "S<46>" at 11.187,33.695 h0.01
  text "S<48>" at 11.241,33.695 h0.01
  text "S<50>" at 11.295,33.695 h0.01
  text "S<52>" at 11.349,33.695 h0.01
  text "S<54>" at 11.403,33.695 h0.01
  text "S<56>" at 11.457,33.695 h0.01
  text "S<58>" at 11.511,33.695 h0.01
  text "S<60>" at 11.565,33.695 h0.01
  text "S<62>" at 11.619,33.695 h0.01
  text "S<64>" at 11.673,33.695 h0.01
  text "S<66>" at 11.727,33.695 h0.01
  text "S<68>" at 11.781,33.695 h0.01
  text "S<70>" at 11.835,33.695 h0.01
  text "S<72>" at 11.889,33.695 h0.01
  text "S<74>" at 11.943,33.695 h0.01
  text "S<76>" at 11.997,33.695 h0.01
  text "S<78>" at 12.051,33.695 h0.01
  text "S<80>" at 12.105,33.695 h0.01
  text "S<82>" at 12.159,33.695 h0.01
  text "S<84>" at 12.213,33.695 h0.01
  text "S<86>" at 12.267,33.695 h0.01
  text "S<88>" at 12.321,33.695 h0.01
  text "S<90>" at 12.375,33.695 h0.01
  text "S<92>" at 12.429,33.695 h0.01
  text "S<94>" at 12.483,33.695 h0.01
  text "S<96>" at 12.537,33.695 h0.01
  text "S<98>" at 12.591,33.695 h0.01
  text "S<100>" at 12.643,33.695 h0.01
  text "S<102>" at 12.697,33.695 h0.01
  text "S<104>" at 12.751,33.695 h0.01
  text "S<106>" at 12.805,33.695 h0.01
  text "S<108>" at 12.859,33.695 h0.01
  text "S<110>" at 12.913,33.695 h0.01
  text "S<112>" at 12.967,33.695 h0.01
  text "S<114>" at 13.021,33.695 h0.01
  text "S<116>" at 13.075,33.695 h0.01
  text "S<118>" at 13.129,33.695 h0.01
  text "DUMMY" at 13.182,33.695 h0.01
  text "DUMMY" at 13.254,33.695 h0.01
  text "DUMMY" at 13.335,33.695 h0.01
  text "DUMMY" at 13.416,33.695 h0.01
  text "DUMMY" at 13.497,33.695 h0.01
  text "DUMMY_VGH" at 13.568,33.695 h0.01
  text "DUMMY" at 13.659,33.695 h0.01
  text "DUMMY" at 13.74,33.695 h0.01
  text "DUMMY_VGL" at 13.811,33.695 h0.01
  text "DUMMY" at 13.902,33.695 h0.01
  text "DUMMY" at 13.983,33.695 h0.01
  text "DUMMY_VINT" at 14.053,33.695 h0.01
  text "DUMMY" at 14.145,33.695 h0.01
  text "DUMMY" at 14.226,33.695 h0.01
  text "DUMMY_VGL" at 14.297,33.695 h0.01
  text "DUMMY" at 14.388,33.695 h0.01
  text "DUMMY" at 14.469,33.695 h0.01
  text "DUMMY_VGH" at 14.54,33.695 h0.01
  text "DUMMY" at 14.631,33.695 h0.01
  text "DUMMY" at 14.712,33.695 h0.01
  text "DUMMY" at 14.793,33.695 h0.01
  text "DUMMY" at 14.874,33.695 h0.01
  text "DUMMY" at 14.946,33.695 h0.01
  text "DUMMY" at 15,33.695 h0.01
  text "S<119>" at 15.055,33.695 h0.01
  text "S<121>" at 15.109,33.695 h0.01
  text "S<123>" at 15.163,33.695 h0.01
  text "S<125>" at 15.217,33.695 h0.01
  text "S<127>" at 15.271,33.695 h0.01
  text "S<129>" at 15.325,33.695 h0.01
  text "S<131>" at 15.379,33.695 h0.01
  text "S<133>" at 15.433,33.695 h0.01
  text "S<135>" at 15.487,33.695 h0.01
  text "S<137>" at 15.541,33.695 h0.01
  text "S<139>" at 15.595,33.695 h0.01
  text "S<141>" at 15.649,33.695 h0.01
  text "S<143>" at 15.703,33.695 h0.01
  text "S<145>" at 15.757,33.695 h0.01
  text "S<147>" at 15.811,33.695 h0.01
  text "S<149>" at 15.865,33.695 h0.01
  text "S<151>" at 15.919,33.695 h0.01
  text "S<153>" at 15.973,33.695 h0.01
  text "S<155>" at 16.027,33.695 h0.01
  text "S<157>" at 16.081,33.695 h0.01
  text "S<159>" at 16.135,33.695 h0.01
  text "S<161>" at 16.189,33.695 h0.01
  text "S<163>" at 16.243,33.695 h0.01
  text "S<165>" at 16.297,33.695 h0.01
  text "S<167>" at 16.351,33.695 h0.01
  text "S<169>" at 16.405,33.695 h0.01
  text "S<171>" at 16.459,33.695 h0.01
  text "S<173>" at 16.513,33.695 h0.01
  text "S<175>" at 16.567,33.695 h0.01
  text "S<177>" at 16.621,33.695 h0.01
  text "S<179>" at 16.675,33.695 h0.01
  text "S<181>" at 16.729,33.695 h0.01
  text "S<183>" at 16.783,33.695 h0.01
  text "S<185>" at 16.837,33.695 h0.01
  text "S<187>" at 16.891,33.695 h0.01
  text "S<189>" at 16.945,33.695 h0.01
  text "S<191>" at 16.999,33.695 h0.01
  text "S<193>" at 17.053,33.695 h0.01
  text "S<195>" at 17.107,33.695 h0.01
  text "S<197>" at 17.161,33.695 h0.01
  text "S<199>" at 17.215,33.695 h0.01
  text "S<201>" at 17.269,33.695 h0.01
  text "S<203>" at 17.323,33.695 h0.01
  text "S<205>" at 17.377,33.695 h0.01
  text "S<207>" at 17.431,33.695 h0.01
  text "S<209>" at 17.485,33.695 h0.01
  text "S<211>" at 17.539,33.695 h0.01
  text "S<213>" at 17.593,33.695 h0.01
  text "S<215>" at 17.647,33.695 h0.01
  text "S<217>" at 17.701,33.695 h0.01
  text "S<219>" at 17.755,33.695 h0.01
  text "S<221>" at 17.809,33.695 h0.01
  text "S<223>" at 17.863,33.695 h0.01
  text "S<225>" at 17.917,33.695 h0.01
  text "S<227>" at 17.971,33.695 h0.01
  text "S<229>" at 18.025,33.695 h0.01
  text "S<231>" at 18.079,33.695 h0.01
  text "S<233>" at 18.133,33.695 h0.01
  text "S_L_TEST" at 18.182,33.695 h0.01
  text "DUMMY" at 18.267,33.695 h0.01
  text "VINT" at 18.336,33.695 h0.01
  text "VGH" at 18.4,33.695 h0.01
  text "VGL" at 18.463,33.695 h0.01
  text "DUMMY" at 18.519,33.695 h0.01
  text "GOA_L<2>" at 18.577,33.695 h0.01
  text "GOA_L<4>" at 18.64,33.695 h0.01
  text "GOA_L<6>" at 18.703,33.695 h0.01
  text "GOA_L<8>" at 18.766,33.695 h0.01
  text "GOA_L<10>" at 18.827,33.695 h0.01
  text "GOA_L<12>" at 18.89,33.695 h0.01
  text "GOA_L<14>" at 18.953,33.695 h0.01
  text "GOA_L<16>" at 19.016,33.695 h0.01
  text "GOA_R<15>" at 9.129,33.605 h0.01
  text "192" at 9.144,33.612 h0.01
  text "GOA_R<13>" at 9.192,33.605 h0.01
  text "194" at 9.207,33.612 h0.01
  text "GOA_R<11>" at 9.255,33.605 h0.01
  text "196" at 9.27,33.612 h0.01
  text "GOA_R<9>" at 9.32,33.605 h0.01
  text "198" at 9.333,33.612 h0.01
  text "GOA_R<7>" at 9.383,33.605 h0.01
  text "200" at 9.397,33.612 h0.01
  text "GOA_R<5>" at 9.446,33.605 h0.01
  text "202" at 9.46,33.612 h0.01
  text "GOA_R<3>" at 9.509,33.605 h0.01
  text "204" at 9.523,33.612 h0.01
  text "GOA_R<1>" at 9.572,33.605 h0.01
  text "206" at 9.585,33.612 h0.01
  text "DUMMY" at 9.64,33.605 h0.01
  text "208" at 9.648,33.612 h0.01
  text "VGL" at 9.71,33.605 h0.01
  text "210" at 9.712,33.612 h0.01
  text "VGH" at 9.773,33.605 h0.01
  text "212" at 9.775,33.612 h0.01
  text "VINT" at 9.835,33.605 h0.01
  text "214" at 9.838,33.612 h0.01
  text "DUMMY" at 9.892,33.605 h0.01
  text "216" at 9.9,33.612 h0.01
  text "S<1>" at 9.974,33.605 h0.01
  text "218" at 9.977,33.612 h0.01
  text "S<3>" at 10.028,33.605 h0.01
  text "220" at 10.031,33.612 h0.01
  text "S<5>" at 10.082,33.605 h0.01
  text "222" at 10.085,33.612 h0.01
  text "S<7>" at 10.136,33.605 h0.01
  text "224" at 10.139,33.612 h0.01
  text "S<9>" at 10.19,33.605 h0.01
  text "226" at 10.193,33.612 h0.01
  text "S<11>" at 10.242,33.605 h0.01
  text "228" at 10.247,33.612 h0.01
  text "S<13>" at 10.296,33.605 h0.01
  text "230" at 10.301,33.612 h0.01
  text "S<15>" at 10.35,33.605 h0.01
  text "232" at 10.355,33.612 h0.01
  text "S<17>" at 10.404,33.605 h0.01
  text "234" at 10.409,33.612 h0.01
  text "S<19>" at 10.458,33.605 h0.01
  text "236" at 10.463,33.612 h0.01
  text "S<21>" at 10.512,33.605 h0.01
  text "238" at 10.517,33.612 h0.01
  text "S<23>" at 10.566,33.605 h0.01
  text "240" at 10.571,33.612 h0.01
  text "S<25>" at 10.62,33.605 h0.01
  text "242" at 10.625,33.612 h0.01
  text "S<27>" at 10.674,33.605 h0.01
  text "244" at 10.679,33.612 h0.01
  text "S<29>" at 10.728,33.605 h0.01
  text "246" at 10.733,33.612 h0.01
  text "S<31>" at 10.782,33.605 h0.01
  text "248" at 10.787,33.612 h0.01
  text "S<33>" at 10.836,33.605 h0.01
  text "250" at 10.841,33.612 h0.01
  text "S<35>" at 10.89,33.605 h0.01
  text "252" at 10.895,33.612 h0.01
  text "S<37>" at 10.944,33.605 h0.01
  text "254" at 10.949,33.612 h0.01
  text "S<39>" at 10.998,33.605 h0.01
  text "256" at 11.003,33.612 h0.01
  text "S<41>" at 11.052,33.605 h0.01
  text "258" at 11.057,33.612 h0.01
  text "S<43>" at 11.106,33.605 h0.01
  text "260" at 11.111,33.612 h0.01
  text "S<45>" at 11.16,33.605 h0.01
  text "262" at 11.165,33.612 h0.01
  text "S<47>" at 11.214,33.605 h0.01
  text "264" at 11.219,33.612 h0.01
  text "S<49>" at 11.268,33.605 h0.01
  text "266" at 11.273,33.612 h0.01
  text "S<51>" at 11.322,33.605 h0.01
  text "268" at 11.327,33.612 h0.01
  text "S<53>" at 11.376,33.605 h0.01
  text "270" at 11.381,33.612 h0.01
  text "S<55>" at 11.43,33.605 h0.01
  text "272" at 11.435,33.612 h0.01
  text "S<57>" at 11.484,33.605 h0.01
  text "274" at 11.489,33.612 h0.01
  text "S<59>" at 11.538,33.605 h0.01
  text "276" at 11.543,33.612 h0.01
  text "S<61>" at 11.592,33.605 h0.01
  text "278" at 11.597,33.612 h0.01
  text "S<63>" at 11.646,33.605 h0.01
  text "280" at 11.651,33.612 h0.01
  text "S<65>" at 11.7,33.605 h0.01
  text "282" at 11.705,33.612 h0.01
  text "S<67>" at 11.754,33.605 h0.01
  text "284" at 11.759,33.612 h0.01
  text "S<69>" at 11.808,33.605 h0.01
  text "286" at 11.813,33.612 h0.01
  text "S<71>" at 11.862,33.605 h0.01
  text "288" at 11.867,33.612 h0.01
  text "S<73>" at 11.916,33.605 h0.01
  text "290" at 11.921,33.612 h0.01
  text "S<75>" at 11.97,33.605 h0.01
  text "292" at 11.975,33.612 h0.01
  text "S<77>" at 12.024,33.605 h0.01
  text "294" at 12.029,33.612 h0.01
  text "S<79>" at 12.078,33.605 h0.01
  text "296" at 12.083,33.612 h0.01
  text "S<81>" at 12.132,33.605 h0.01
  text "298" at 12.137,33.612 h0.01
  text "S<83>" at 12.186,33.605 h0.01
  text "300" at 12.191,33.612 h0.01
  text "S<85>" at 12.24,33.605 h0.01
  text "302" at 12.245,33.612 h0.01
  text "S<87>" at 12.294,33.605 h0.01
  text "304" at 12.299,33.612 h0.01
  text "S<89>" at 12.348,33.605 h0.01
  text "306" at 12.353,33.612 h0.01
  text "S<91>" at 12.402,33.605 h0.01
  text "308" at 12.407,33.612 h0.01
  text "S<93>" at 12.456,33.605 h0.01
  text "310" at 12.461,33.612 h0.01
  text "S<95>" at 12.51,33.605 h0.01
  text "312" at 12.515,33.612 h0.01
  text "S<97>" at 12.564,33.605 h0.01
  text "314" at 12.569,33.612 h0.01
  text "S<99>" at 12.618,33.605 h0.01
  text "316" at 12.623,33.612 h0.01
  text "S<101>" at 12.67,33.605 h0.01
  text "318" at 12.677,33.612 h0.01
  text "S<103>" at 12.724,33.605 h0.01
  text "320" at 12.731,33.612 h0.01
  text "S<105>" at 12.778,33.605 h0.01
  text "322" at 12.785,33.612 h0.01
  text "S<107>" at 12.832,33.605 h0.01
  text "324" at 12.839,33.612 h0.01
  text "S<109>" at 12.886,33.605 h0.01
  text "326" at 12.893,33.612 h0.01
  text "S<111>" at 12.94,33.605 h0.01
  text "328" at 12.947,33.612 h0.01
  text "S<113>" at 12.994,33.605 h0.01
  text "330" at 13.001,33.612 h0.01
  text "S<115>" at 13.048,33.605 h0.01
  text "332" at 13.055,33.612 h0.01
  text "S<117>" at 13.102,33.605 h0.01
  text "334" at 13.109,33.612 h0.01
  text "DUMMY" at 13.155,33.605 h0.01
  text "336" at 13.163,33.612 h0.01
  text "DUMMY" at 13.209,33.605 h0.01
  text "338" at 13.217,33.612 h0.01
  text "DUMMY" at 13.294,33.605 h0.01
  text "340" at 13.302,33.612 h0.01
  text "DUMMY" at 13.375,33.605 h0.01
  text "342" at 13.383,33.612 h0.01
  text "DUMMY" at 13.456,33.605 h0.01
  text "344" at 13.464,33.612 h0.01
  text "DUMMY" at 13.537,33.605 h0.01
  text "346" at 13.545,33.612 h0.01
  text "DUMMY_VGH" at 13.609,33.605 h0.01
  text "348" at 13.626,33.612 h0.01
  text "DUMMY" at 13.699,33.605 h0.01
  text "350" at 13.707,33.612 h0.01
  text "DUMMY" at 13.78,33.605 h0.01
  text "352" at 13.788,33.612 h0.01
  text "DUMMY_VGL" at 13.852,33.605 h0.01
  text "354" at 13.869,33.612 h0.01
  text "DUMMY" at 13.942,33.605 h0.01
  text "356" at 13.95,33.612 h0.01
  text "DUMMY" at 14.023,33.605 h0.01
  text "358" at 14.031,33.612 h0.01
  text "DUMMY_VINT" at 14.094,33.605 h0.01
  text "360" at 14.112,33.612 h0.01
  text "DUMMY" at 14.185,33.605 h0.01
  text "362" at 14.193,33.612 h0.01
  text "DUMMY_VGL" at 14.257,33.605 h0.01
  text "364" at 14.274,33.612 h0.01
  text "DUMMY" at 14.347,33.605 h0.01
  text "366" at 14.355,33.612 h0.01
  text "DUMMY" at 14.428,33.605 h0.01
  text "368" at 14.436,33.612 h0.01
  text "DUMMY_VGH" at 14.5,33.605 h0.01
  text "370" at 14.517,33.612 h0.01
  text "DUMMY" at 14.59,33.605 h0.01
  text "372" at 14.598,33.612 h0.01
  text "DUMMY" at 14.671,33.605 h0.01
  text "374" at 14.679,33.612 h0.01
  text "DUMMY" at 14.752,33.605 h0.01
  text "376" at 14.76,33.612 h0.01
  text "DUMMY" at 14.833,33.605 h0.01
  text "378" at 14.841,33.612 h0.01
  text "DUMMY" at 14.919,33.605 h0.01
  text "380" at 14.927,33.612 h0.01
  text "DUMMY" at 14.973,33.605 h0.01
  text "382" at 14.981,33.612 h0.01
  text "DUMMY" at 15.027,33.605 h0.01
  text "384" at 15.035,33.612 h0.01
  text "S<120>" at 15.082,33.605 h0.01
  text "386" at 15.089,33.612 h0.01
  text "S<122>" at 15.136,33.605 h0.01
  text "388" at 15.143,33.612 h0.01
  text "S<124>" at 15.19,33.605 h0.01
  text "390" at 15.197,33.612 h0.01
  text "S<126>" at 15.244,33.605 h0.01
  text "392" at 15.251,33.612 h0.01
  text "S<128>" at 15.298,33.605 h0.01
  text "394" at 15.305,33.612 h0.01
  text "S<130>" at 15.352,33.605 h0.01
  text "396" at 15.359,33.612 h0.01
  text "S<132>" at 15.406,33.605 h0.01
  text "398" at 15.413,33.612 h0.01
  text "S<134>" at 15.46,33.605 h0.01
  text "400" at 15.467,33.612 h0.01
  text "S<136>" at 15.514,33.605 h0.01
  text "402" at 15.521,33.612 h0.01
  text "S<138>" at 15.568,33.605 h0.01
  text "404" at 15.575,33.612 h0.01
  text "S<140>" at 15.622,33.605 h0.01
  text "406" at 15.629,33.612 h0.01
  text "S<142>" at 15.676,33.605 h0.01